# Altium PCB PCB1.PcbDoc
Units mm, origin at the board's own origin, x right, y up, seen from the top; angles counter-clockwise.
Board outline 160 x 100 mm, 4 copper layers (Top Layer, Top inner, Bottom inner, Bottom Layer), stack 1.538 mm thick; 114 components, 70 nets, 369 pads, 84 vias.
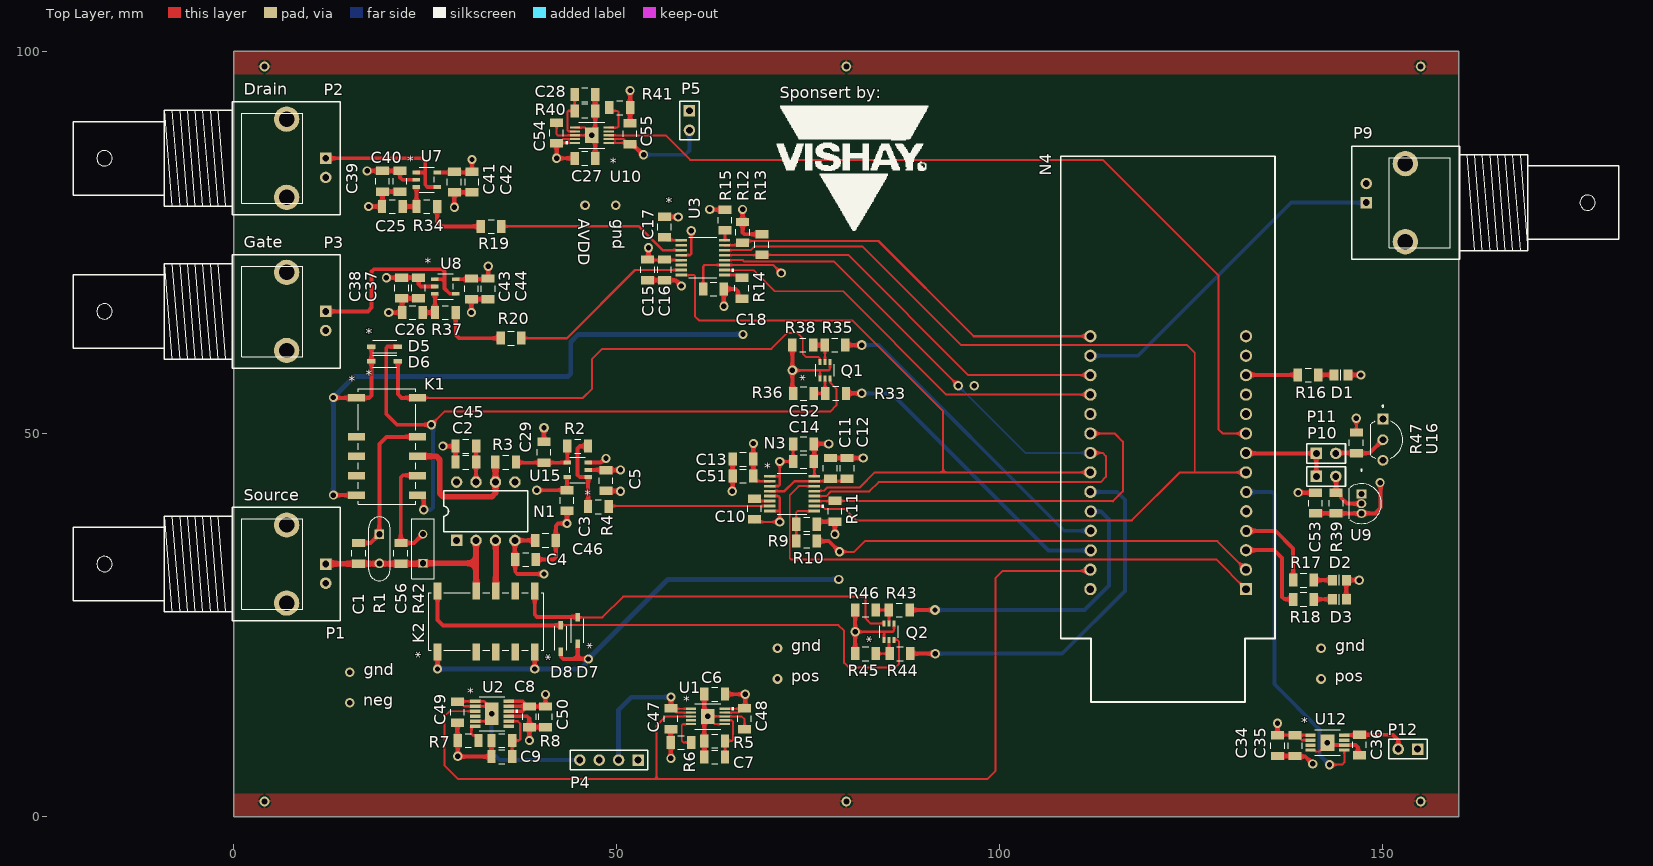
[diagram p0: Top Layer view]
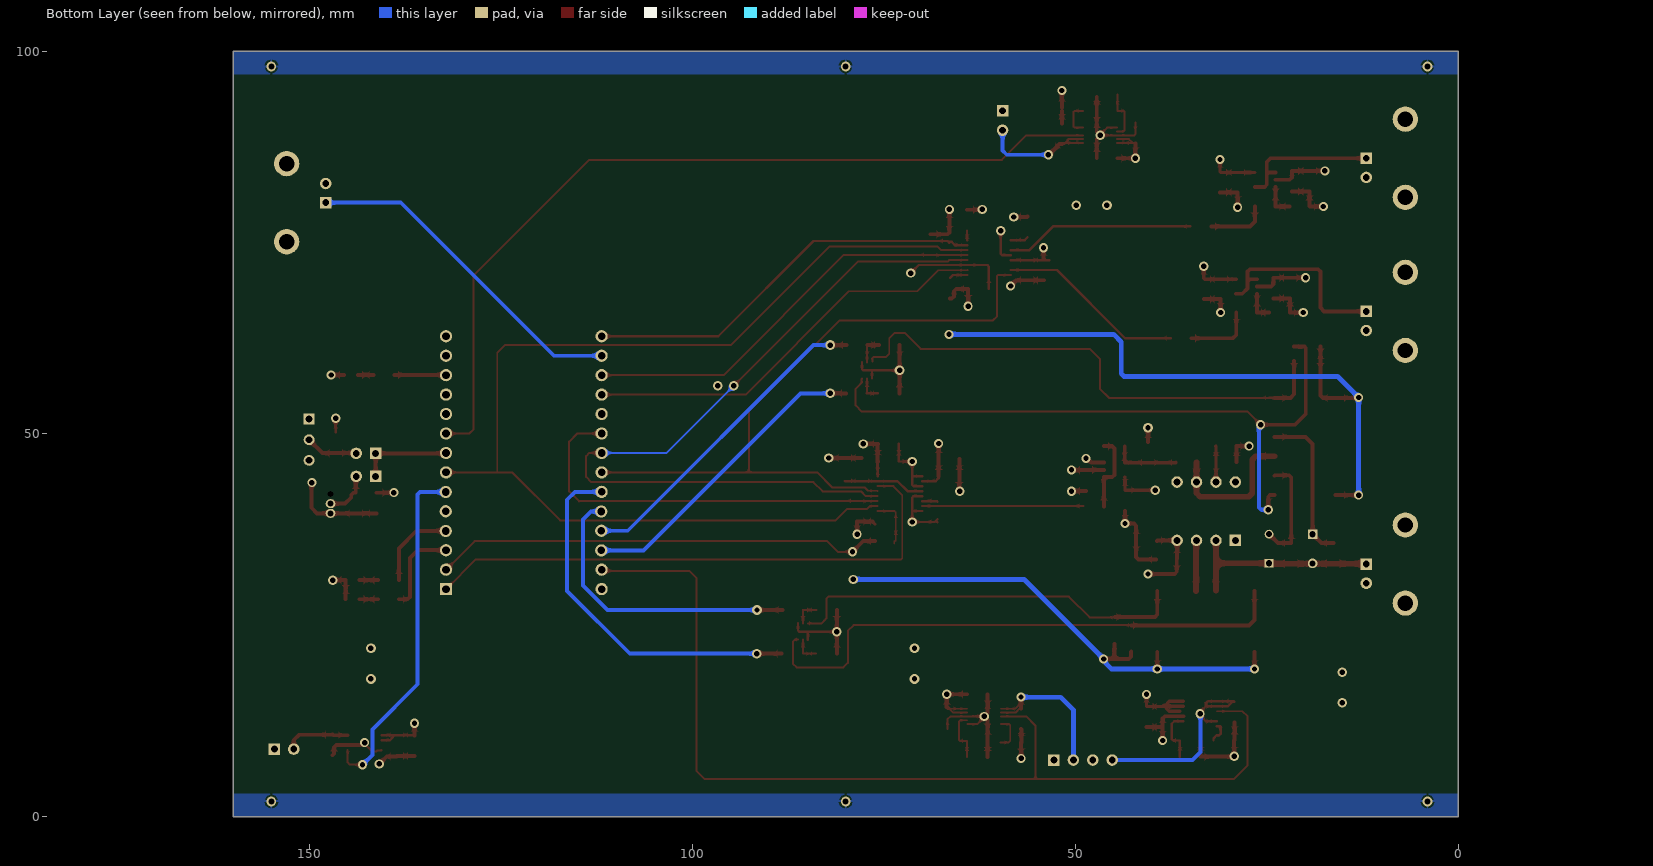
[diagram p1: Bottom Layer view, seen from below]
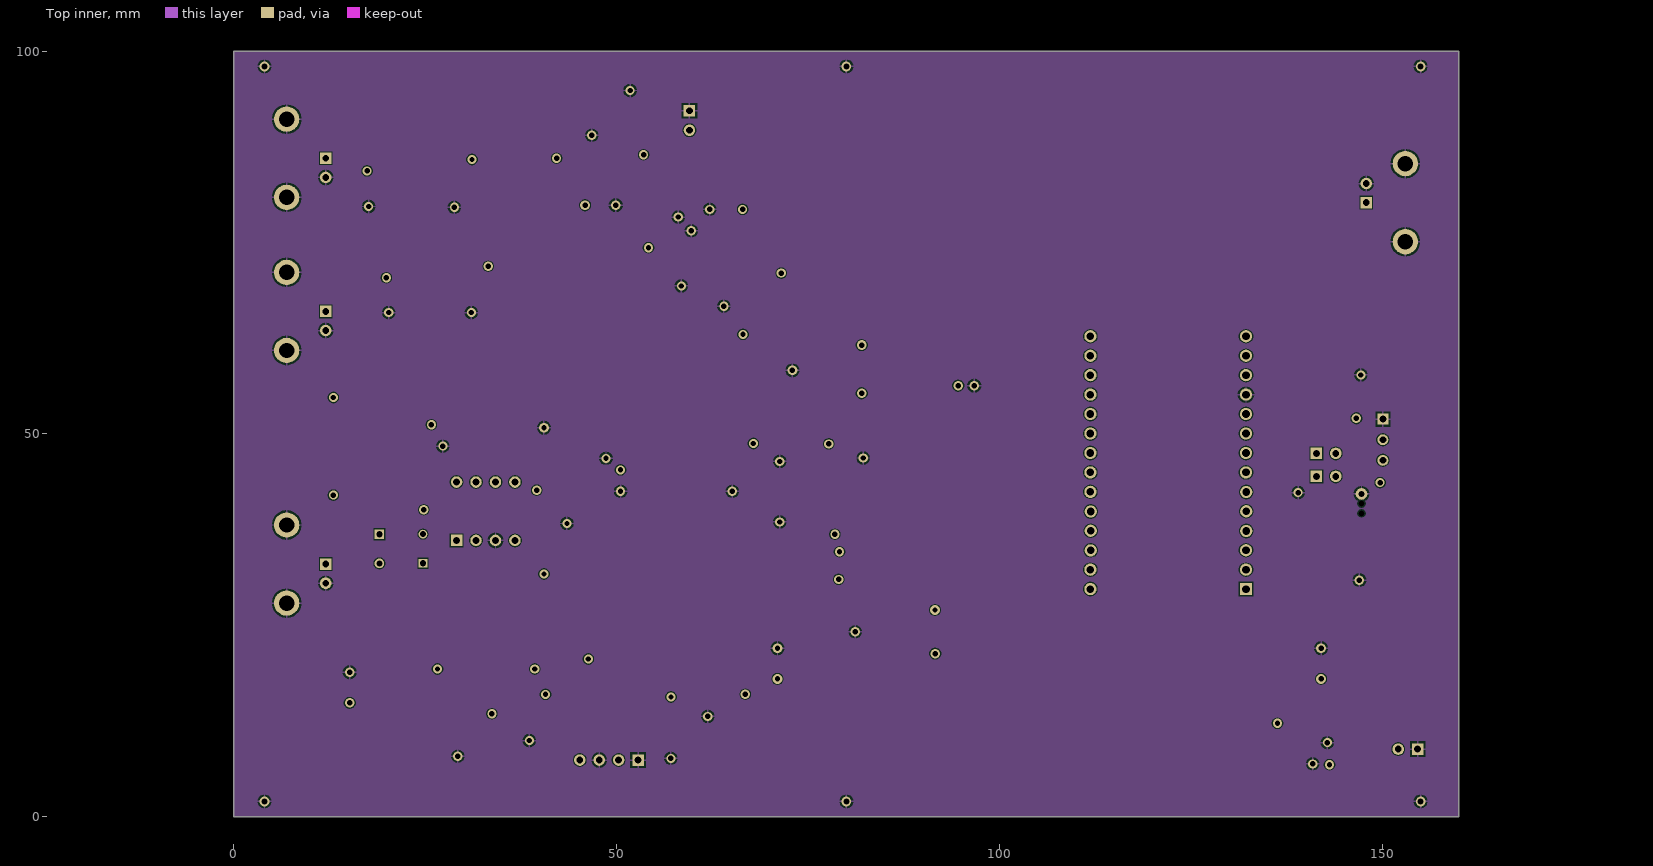
[diagram p2: Top inner]
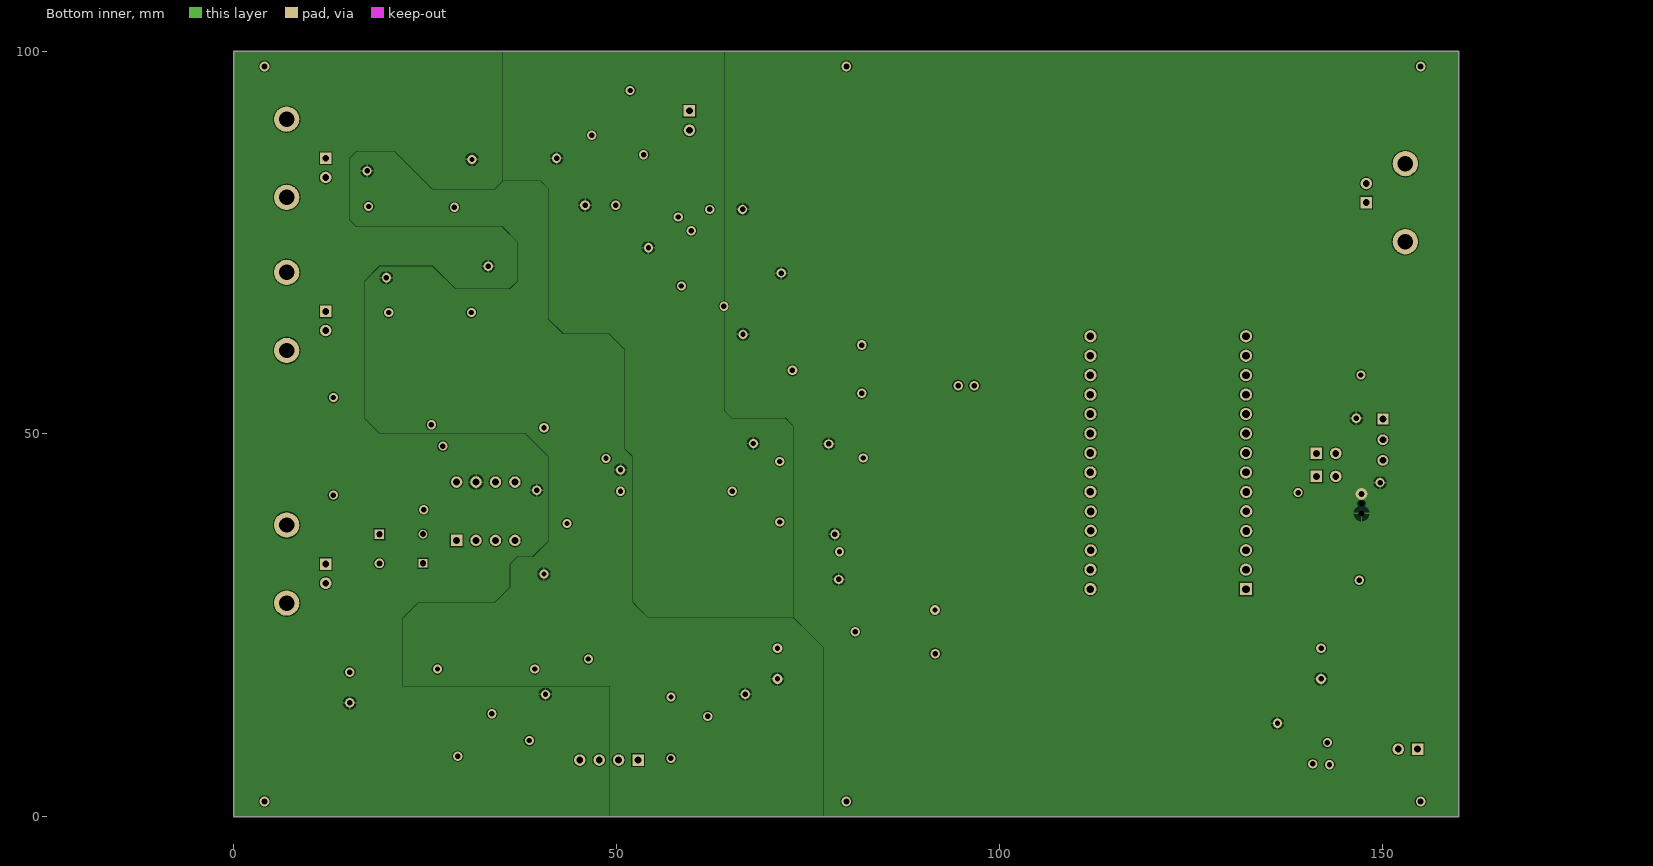
[diagram p3: Bottom inner]
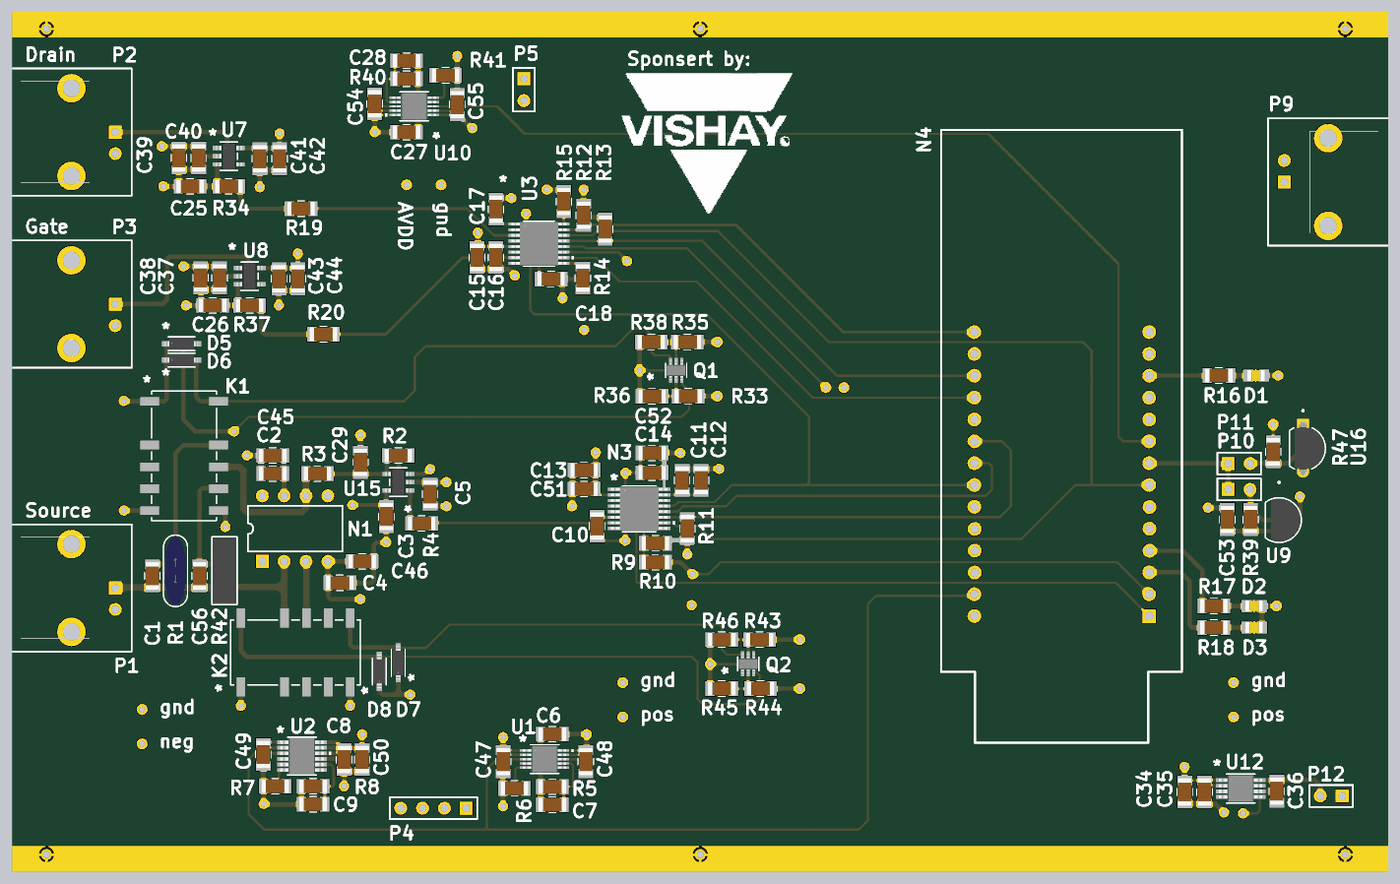
[diagram p4: 3D render of the assembled board from above, using the file's embedded part models]

## Layer stack, top to bottom
Top Solder: solder mask 0.0102, Solder Resist, Dk 3.5
Top Layer: signal copper 0.0356
Dielectric 4: prepreg 0.1524, PP-006, Dk 4.4
Top inner: signal copper 0.035
Dielectric 1: dielectric 1.0922, FR-4, Dk 4.8
Bottom inner: signal copper 0.035
Dielectric 5: prepreg 0.1524, PP-006, Dk 4.4
Bottom Layer: signal copper 0.0356
Bottom Solder: solder mask 0.0102, Solder Resist, Dk 3.5

## Board outline
0,0 160,0 160,100 0,100

## Design rules (kind name [scope] priority, off if disabled: settings)
Clearance [All] p1: gap=0.127 ignorepadtopadclearanceinfootprint=TRUE except(0.025: THPad-THPad)
MinimumSolderMaskSliver THT_21-0248A_Q3-1_MXM [HasFootprint('21-0248A_Q3-1_MXM')] p1: minsoldermaskwidth=0
MinimumSolderMaskSliver [All] p2: minsoldermaskwidth=0.127
PolygonConnect [All] p1: connectstyle=Relief reliefconductorwidth=0.254 reliefentries=4 polygonreliefangle="90 Angle" airgapwidth=0.254
RoutingVias [All] p1: holewidth=0.6 width=1.2 viastyle="Through Hole" minholewidth=0.3 minwidth=0.6 maxholewidth=1 maxwidth=2
SilkToSolderMaskClearance SilkToSolderMaskClearance_1 [HasFootprint('BNC_RA CON')] p1: minsilkscreentomaskgap=0 clearancetoexposedcopper=TRUE
SilkToSolderMaskClearance [IsPad] p2: minsilkscreentomaskgap=0.127 clearancetoexposedcopper=TRUE
SolderMaskExpansion [All] p1: expansion=0.102 istentingtop=FALSE
Width Source [InNet('M_source')] p1: maxlimit=2.54 minlimit=0.254 preferedwidth=0.762
Width Width_1 [All] p2: maxlimit=0.762 minlimit=0.254 preferedwidth=0.762
28 further rules are at their usual default settings.

## Classes and differential pairs
component class U_Cal: Q1 Q2 R33 R35 R36 R38 R43 R44 R45 R46
component class U_Digital_Psu: C34 C35 C36 U12
component class U_Analog_PSU_5: C27 C28 C54 R40 R41 U10
component class U_Temp_Sensors: C53 P10 P11 R39 R47 U9 U16
component class U_Source_TIA: C1 C2 C3 C4 C5 C29 C45 C46 C56 D5 D6 D7 D8 K1 K2 N1 R1 R2 R3 R4 R42 U15
component class U_OPV_psu: C6 C7 C8 C9 C47 C48 C49 C50 R5 R6 R7 R8 U1 U2
component class U_DAC_Buffer_Filter: C25 C26 C37 C38 C39 C40 C41 C42 C43 C44 R19 R20 R34 R37 U7 U8
component class U_CortexM3_dev: D1 D2 D3 N4 R16 R17 R18
component class U_ADC_8681: C10 C11 C12 C13 C14 C51 C52 N3 R9 R10 R11
component class U_AD_5689_DAC: C15 C16 C17 C18 R12 R13 R14 R15 U3
component class Top_Sheet: C55 P1 P2 P3 P4 P5 P9 P12

## Components (designator, comment, footprint, x,y, rotation, side; value= is the part's Value field where it differs from the comment)
C1 "22pF" C1206-KUE 16.3,34.4 r90 top
C2 "100nF" C1206-KUE 30.3,46.3 r0 top
C3 "100nF" C1206-KUE 43.503,41.3 r90 top
C4 "100nF" C1206-KUE 38.1,33.6 r180 top
C5 "100nF" C1206-KUE 48.603,43.9 r90 top
C6 "10uF" C1206-KUE 62.8,16 r0 top
C7 "4.7uF" C1206-KUE 62.8,7.8 r0 top
C8 "10uF" C1206-KUE 38.6,13.049 r90 top
C9 "4.7uF" C1206-KUE 35,7.849 r0 top
C10 "10uF" C1206-KUE 68,40.2 r90 top
C11 "100nF" C1206-KUE 77.9,45.5 r270 top
C12 "10uF" C1206-KUE 80.1,45.5 r270 top
C13 "100nF" C1206-KUE 66.5,46.7 r0 top
C14 "100nF" C1206-KUE 74.4,46.4 r0 top
C15 "10uF" C1206-KUE 54.05,71.425 r90 top
C16 "100nF" C1206-KUE 56.25,71.425 r90 top
C17 "100nF" C1206-KUE 56.25,77.025 r270 top
C18 "100nF" C1206-KUE 62.65,68.925 r180 top
C25 "1uF" C1206-KUE 20.7,79.7 r0 top
C26 "1uF" C1206-KUE 23.324,65.85 r0 top
C27 "10uF" C1206-KUE 45.849,86 r180 top
C28 "4.7uF" C1206-KUE 45.849,94.3 r180 top
C29 "" C1206-KUE 40.5,47.6 r270 top
C34 "100nF" C1206-KUE 136.323,9.279 r90 top
C35 "10uF" C1206-KUE 138.623,9.279 r90 top
C36 "4.7uF" C1206-KUE 147.023,9.379 r90 top
C37 "100nF" C1206-KUE 24.124,69.05 r90 top
C38 "1uF" C1206-KUE 21.924,69.05 r90 top
C39 "100nF" C1206-KUE 19.4,83 r90 top
C40 "1uF" C1206-KUE 21.7,83 r90 top
C41 "100nF" C1206-KUE 28.8,82.9 r90 top
C42 "1uF" C1206-KUE 31.1,82.9 r90 top
C43 "100nF" C1206-KUE 31.024,68.95 r90 top
C44 "1uF" C1206-KUE 33.224,68.95 r90 top
C45 "10uF" C1206-KUE 30.3,48.4 r0 top
C46 "10uF" C1206-KUE 40.7,36.1 r0 top
C47 "10uF" C1206-KUE 57.1,12.8 r90 top
C48 "100nF" C1206-KUE 66.7,12.8 r90 top
C49 "10uF" C1206-KUE 29.2,13.649 r90 top
C50 "100nF" C1206-KUE 40.7,13.049 r90 top
C51 "10uF" C1206-KUE 66.5,44.5 r0 top
C52 "10uF" C1206-KUE 74.4,48.7 r0 top
C53 "1uF" C1206-KUE 141.277,40.961 r270 top
C54 "100nF" C1206-KUE 42.149,89.3 r270 top
C55 "100nF" C1206-KUE 51.749,89.2 r270 top
C56 "22pF" C1206-KUE 21.8,34.4 r90 top
D1 "GREEN" 6-0805_N-KUE 144.6,57.7 r0 top
D2 "GREEN" 6-0805_N-KUE 144.4,30.9 r0 top
D3 "RED" 6-0805_N-KUE 144.4,28.4 r0 top
D5 "1N4148W-7" SOD123_DIO 19.7,61.4 r0 top
D6 "1N4148W-7" SOD123_DIO 19.7,59.5 r0 top
D7 "1N4148W-7" SOD123_DIO 44.9,24.3 r90 top
D8 "1N4148W-7" SOD123_DIO 42.7,23.3 r90 top
K1 "G6SK-2F-TR DC3" "RELAY_G6SK-2F DC3_OMR" 24,42 r0 top
K2 "G6SK-2F-TR DC3" "RELAY_G6SK-2F DC3_OMR" 39.3,29.5 r90 top
N1 "LMC6001AIN/NOPB" DIP8 32.9,39.9 r0 top
N3 "ADS8681IPW" PW16_TEX 72.9,42.2 r0 top
N4 "STM32F103" DIP28 136,15 r180 top
P1 "BNC" "BNC_RA CON" 12,33 r0 top
P2 "BNC" "BNC_RA CON" 12,86 r0 top
P3 "BNC" "BNC_RA CON" 12,66 r0 top
P4 "Header 4" HDR1X4 52.8,7.4 r180 top
P5 "Header 2" HDR1X2 59.5,92.2 r270 top
P9 "BNC" "BNC_RA CON" 147.9,80.2 r180 top
P10 "Header 2" HDR1X2 141.377,44.461 r0 top
P11 "Header 2" HDR1X2 141.377,47.461 r0 top
P12 "Header 2" HDR1X2 154.617,8.821 r180 top
Q1 "2N7002DW" SC-88SC70-6SOT-363_419B-02_ONS_OSI 77.2,58.3 r90 top
Q2 "2N7002DW" SC-88SC70-6SOT-363_419B-02_ONS_OSI 85.575,24.175 r90 top
R1 "CNS020-10MP" RES_CNS020_VIS 19,36.9 r270 top
R2 "10k" C1206-KUE 44.903,48.4 r180 top
R3 "33k" C1206-KUE 35.5,46.3 r180 top
R4 "10" C1206-KUE 47.603,40.5 r180 top
R5 "78.7k" C1206-KUE 62.8,9.9 r180 top
R6 "0" C1206-KUE 58.4,9.7 r180 top
R7 "0" C1206-KUE 30.6,9.949 r180 top
R8 "78.7k" C1206-KUE 35,9.949 r180 top
R9 "10k" C1206-KUE 74.8,38.2 r180 top
R10 "1k" C1206-KUE 74.8,36 r180 top
R11 "4.7k" C1206-KUE 78.5,39.9 r90 top
R12 "4.7k" C1206-KUE 66.45,76.325 r270 top
R13 "4.7k" C1206-KUE 68.95,74.725 r270 top
R14 "10k" C1206-KUE 66.35,69.025 r270 top
R15 "10k" C1206-KUE 64.15,77.925 r90 top
R16 "3.9k" C1206-KUE 140.3,57.7 r0 top
R17 "3.9k" C1206-KUE 139.7,30.9 r0 top
R18 "2.7k" C1206-KUE 139.7,28.4 r0 top
R19 "0" C1206-KUE 33.6,77.1 r180 top
R20 "0" C1206-KUE 36.2,62.5 r180 top
R33 "1k" C1206-KUE 78.6,55.3 r0 top
R34 "10k" C1206-KUE 25.2,79.7 r180 top
R35 "1k" C1206-KUE 78.5,61.6 r0 top
R36 "10k" C1206-KUE 74.4,55.275 r180 top
R37 "10k" C1206-KUE 27.624,65.85 r180 top
R38 "10k" C1206-KUE 74.3,61.6 r180 top
R39 "4.7k" C1206-KUE 143.977,40.961 r90 top
R40 "49.9k" C1206-KUE 45.849,92.2 r0 top
R41 "0" C1206-KUE 50.4,92.6 r0 top
R42 "Y0062100K000T9L" RES_S102K_7P62X2P67_VIS 24.7,33.1 r90 top
R43 "1k" C1206-KUE 86.9,27 r180 top
R44 "1k" C1206-KUE 87,21.3 r0 top
R45 "10k" C1206-KUE 82.5,21.3 r180 top
R46 "10k" C1206-KUE 82.5,27 r180 top
R47 "1k" C1206-KUE 146.604,48.834 r270 top
U1 "LT3042EMSE#TRPBF" 05-08-1664_ADI 61.9,13.1 r0 top
U2 "LT3094EMSE#TRPBF" MSE_05-08-1666_ADI 33.7,13.449 r0 top
U3 "AD5689RBRUZ" RU_16_ADI 61.25,73.025 r0 top
U7 "OPA197IDBVR" DBV5_TEX 25.2,83.2 r0 top
U8 "OPA197IDBVR" DBV5_TEX 27.624,69.25 r0 top
U9 "DS18B20+" 21-0248A_Q3-1_MXM 147.277,42.161 r270 top
U10 "LT3042EMSE#TRPBF" 05-08-1664_ADI 46.749,89 r180 top
U12 "TLV76733DGNR" VSSOP8_DGN_TEX 142.823,9.679 r0 top
U15 "OPA197IDBVR" DBV5_TEX 44.903,45.3 r180 top
U16 "DS28E07+T" 21-0250_Q3+4_MXM 150.073,51.927 r270 top

## Footprints (in the part's own frame and the unit in brackets; to place one, negate y for a bottom-side part, rotate by r counter-clockwise, add the part's x,y. Pads: shape width x height; smd on the part's side, far side on the other; paste and mask are expansions set on the pad)
05-08-1664_ADI [mil]
  rect 52.28x11 smd paste+0 mask+0: 1(-87.14,39.37) 2(-87.14,19.69) 3(-87.14,0) 4(-87.14,-19.68) 5(-87.14,-39.37) 6(87.14,-39.37) 7(87.14,-19.68) 8(87.14,0) 9(87.14,19.69) 10(87.14,39.37)
  rect 70x78 smd paste+0 mask+0: 11(0,0)
  silkscreen extent -66,-66 133,66, body extent -99,-61 99,61, height 43
6-0805_N-KUE [mm] "Chip Resistor, Body 2.0x1.2mm, IPC Medium Density"
  rect 1.2x1.4 smd: 1(-0.9,0) 2(0.9,0)
  silkscreen extent 0,-0.69 0,0.69, body extent -1,-0.63 1,0.63, height 0.8
21-0248A_Q3-1_MXM [mm]
  rect 1.168x1.27 / inner round 1.524 / far side rect 1.168x0 hole 0.8 paste-0.635 mask+0: 1(0,0)
  oval 1.168x1.27 / inner oval 1.524x0 / far side oval 1.168x1.27 hole 0.8 paste-0.635 mask+0: 2(1.27,0) 3(2.54,0)
  silkscreen extent -3.24,-1.59 3.87,2.6, body extent -1.21,-0.95 3.75,2.48, height 4.95
21-0250_Q3+4_MXM [mil]
  rect 56x56 hole 35 paste-28 mask+0: 1(0,0)
  round 56 hole 35 paste-28 mask+0: 2(105.91,0) 3(211.81,0)
  silkscreen extent -72,-62 200,102, body extent -12,-37 224,98, height 195
"BNC_RA CON" [mm] "Connector; BNC Elbow"
  rect 1.5x1.5 hole 0.9: 1(0,0)
  round 3.3 hole 2: 2(-5.1,-5.1) 2(-5.1,5.1)
  round 1.5 hole 0.9: 2(0,-2.5)
  silkscreen extent -33,-7.4 1.9,7.4
C1206-KUE [mm] "Chip Capacitor, Body 3.2x1.6mm, IPC High Density"
  rect 1.1x1.7 smd: 1(-1.35,0) 2(1.35,0)
  silkscreen extent -0.4,-0.9 0.4,0.9, body extent -1.6,-0.8 1.6,0.8, height 0.95
DBV5_TEX [mil]
  rect 38.5x20 smd paste+0 mask+0: 1(-53.75,37.4) 2(-53.75,0) 3(-53.75,-37.4) 4(53.75,-37.4) 5(53.75,37.4)
  silkscreen extent -40,-65 39,65, body extent -59,-60 59,60, height 57
DIP8 [mm] "DIP; 8 Leads; Row Spacing 7.62 mm; Pitch 2.54 mm"
  rect 1.5x1.5 hole 0.9: 1(-3.81,-3.81)
  round 1.5 hole 0.9: 2(-1.27,-3.81) 3(1.27,-3.81) 4(3.81,-3.81) 5(3.81,3.81) 6(1.27,3.81) 7(-1.27,3.81) 8(-3.81,3.81)
  silkscreen extent -5.5,-2.65 5.5,2.65
DIP28 [mm]
  round 1.6 hole 1: 1(24.13,-47.752) 2(24.13,-45.212) 3(24.13,-42.672) 4(24.13,-40.132) 5(24.13,-37.592) 6(24.13,-35.052) 7(24.13,-32.512) 8(24.13,-29.972) 9(24.13,-27.432) 10(24.092,-24.868) 11(24.092,-22.349) 12(24.092,-19.788) 13(24.13,-17.272) 14(24.13,-14.732) 15(3.81,-47.752) 16(3.81,-45.212) 17(3.81,-42.672) 18(3.81,-40.132) 19(3.81,-37.592) 20(3.81,-35.052) 21(3.81,-32.512) 22(3.81,-29.972) 23(3.772,-27.408) 24(3.772,-24.889) 25(3.772,-22.328) 26(3.81,-19.812) 27(3.81,-17.272)
  rect 1.6x1.6 hole 1: 28(3.81,-14.732)
  silkscreen extent 0,-71.26 28,0
HDR1X2 [mm] "Connector; Header; 2 Position"
  rect 1.5x1.5 hole 0.9: 1(0,0)
  round 1.5 hole 0.9: 2(2.54,0)
  silkscreen extent -1.27,-1.27 3.81,1.27
HDR1X4 [mm] "Connector; Header; 4 Position"
  rect 1.5x1.5 hole 0.9: 1(0,0)
  round 1.5 hole 0.9: 2(2.54,0) 3(5.08,0) 4(7.62,0)
  silkscreen extent -1.27,-1.27 8.89,1.27
MSE_05-08-1666_ADI [mil]
  rect 54.56x16.97 smd paste+0 mask+0: 1(-86,63.98) 2(-86,38.39) 3(-86,12.8) 4(-86,-12.8) 5(-86,-38.39) 6(-86,-63.98) 7(86,-63.98) 8(86,-38.39) 9(86,-12.8) 10(86,12.8) 11(86,38.39) 12(86,63.98)
  rect 69x116 smd paste-57.5 mask+0: 13(0,0)
  silkscreen extent -66,-87 133,86, body extent -99,-81 99,81, height 43
PW16_TEX [mil]
  rect 58x14 smd paste+0 mask+0: 1(-115,89.57) 2(-115,63.98) 3(-115,38.39) 4(-115,12.8) 5(-115,-12.79) 6(-115,-38.39) 7(-115,-63.98) 8(-115,-89.57) 9(115,-89.57) 10(115,-63.98) 11(115,-38.39) 12(115,-12.8) 13(115,12.8) 14(115,38.39) 15(115,63.98) 16(115,89.57)
  silkscreen extent -76,-106 164,105, body extent -130,-101 130,101, height 47
"RELAY_G6SK-2F DC3_OMR" [mil]
  rect 87x39 smd paste+0 mask+0: 1(-314.96,500) 3(-314.96,300) 4(-314.96,200) 5(-314.96,100) 6(-314.96,0) 7(0,0) 8(0,100) 9(0,200) 10(0,300) 12(0,500)
  silkscreen extent -306,-46 -9,546
RES_CNS020_VIS [mm]
  rect 1.27x1.27 hole 0.8 paste-0.635 mask+0: 1(0,0)
  round 1.27 hole 0.8 paste-0.635 mask+0: 2(3.81,0)
  silkscreen extent -2.26,-1.4 6.07,1.4, body extent -2.13,-1.27 5.94,1.27, height 6.6
RES_S102K_7P62X2P67_VIS [mil]
  rect 45x45 hole 31.5 paste-22.5 mask+0: 1(0,0)
  round 45 hole 31.5 paste-22.5 mask+0: 2(150,0)
  silkscreen extent -80,-57 230,58, body extent -75,-53 225,53, height 336
RU_16_ADI [mm]
  rect 1.461x0.351 smd paste+0 mask+0: 1(-2.825,2.275) 2(-2.825,1.625) 3(-2.825,0.975) 4(-2.825,0.325) 5(-2.825,-0.325) 6(-2.825,-0.975) 7(-2.825,-1.625) 8(-2.825,-2.275) 9(2.825,-2.275) 10(2.825,-1.625) 11(2.825,-0.975) 12(2.825,-0.325) 13(2.825,0.325) 14(2.825,0.975) 15(2.825,1.625) 16(2.825,2.275)
  silkscreen extent -1.81,-2.63 4.06,2.63, body extent -3.2,-2.5 3.2,2.5, height 1.2
SC-88SC70-6SOT-363_419B-02_ONS_OSI [mm]
  rect 0.782x0.355 smd paste+0 mask+0: 1(-1.064,0.65) 2(-1.064,0) 3(-1.064,-0.65) 4(1.064,-0.65) 5(1.064,0) 6(1.064,0.65)
  silkscreen extent -0.8,-1.23 0.8,1.23, body extent -1.1,-1.1 1.1,1.1, height 1.09
SOD123_DIO [mm]
  rect 1.111x0.601 smd paste+0 mask+0: 1(-1.725,0) 2(1.725,0)
  silkscreen extent -1.55,-0.8 1.55,0.8, body extent -1.92,-0.67 1.92,0.67, height 0.81
VSSOP8_DGN_TEX [mil]
  rect 52.5x17 smd paste+0 mask+0: 1(-87.25,38.38) 2(-87.25,12.79) 3(-87.25,-12.8) 4(-87.25,-38.39) 5(87.25,-38.39) 6(87.25,-12.8) 7(87.25,12.79) 8(87.25,38.38)
  rect 73x85 smd paste+0 mask+0: EPAD(0,0)
  silkscreen extent -66,-66 66,66, body extent -99,-61 99,61, height 43

## Part data
C1 C2 C3 C4 C5 C6 C7 C8 C9 C10 C11 C12 C13 C14 C15 C16 C17 C18 C25 C26 C27 C28 C29 C34 C35 C36 C37 C38 C39 C40 C41 C42 C43 C44 C45 C46 C47 C48 C49 C50 C51 C52 C53 C54 C55 C56: library part Capacitor, "Capacitor", Manufacturer=Kemet, Bezeichnung="Kerko +-10% 63V", LatestRevisionDate=17-Jul-2002, LatestRevisionNote="Re-released for DXP Platform.", PackageDescription="Radial Cap, Thru-Hole; 2 Leads; 0.3 in Pin Spacing", PackageReference=RAD-0.3, Published=8-Jun-2000, Publisher="Altium Limited"
D1 D2 D3: library part LED0, "Typical INFRARED GaAs LED", LatestRevisionDate=08-Jul-2005, LatestRevisionNote="Mech Layer 1 removed.", PackageDescription="LED; 2 Leads", PackageReference=LED-0, Published=8-Jun-2000, Publisher="Altium Limited"
D5 D6 D7 D8: "Description", Manufacturer_Name="Diodes Inc", Copyright="Copyright (C) 2026 Ultra Librarian. All rights reserved.", Manufacturer_Part_Number=1N4148W-7
K1 K2: "Description", Manufacturer_Name=Omron, Copyright="Copyright (C) 2026 Ultra Librarian. All rights reserved.", Manufacturer_Part_Number="G6SK-2F-TR DC3", RefDes=RefDes, Type=Type
N1: library part LMC6001AINNOPB, "Ultra-Low Input Current Amplifier 8-PDIP -40 to 85", Manufacturer=NationalSemiconductor, Manufacturer_Name="Texas Instruments", PartNumber=LMC6001AIN, Characteristics=LMC6001AINUltra-LowInputBiasCurrentOpAmp, ComponentLink1DescBC=LMC6001Datasheet, ComponentLink1URL=http//wwwnationalcom/ds/LM/LMC6001pdf, ComponentLink2DescA4=LMC6001WebPage, ComponentLink2URL=http//wwwnationalcom/pf/LM/LMC6001html, ComponentLink3DescAC=N08EPackageWebPage, ComponentLink3URL=http//wwwnationalcom/packaging/folders/n08ehtml, CompType=OpAmpIC, Copyright="Copyright (C) 2025 Ultra Librarian. All rights reserved.", LatestRevisionDate=2009-03-16, LatestRevisionNote=MassUpdate, Manufacturer_Part_Number=LMC6001AIN/NOPB, PackageDescription=8LeadPlasticDIP, PackageReference=N08E_L, Published=2009-03-16, Publisher=NationalSemiconductor, RoHS=O, SymbolVersion=2008-07-09, TaMax_C=850, TaMin_C=-400, Version=B1608
N3: "16-bit, 1MSPS 1-ch SAR ADC with programmable (Â±12V, Â±10V, Â±6V, Â±5V, Â±2.5V) input ranges on 5V supply 16-TSSOP -40 to 125", Manufacturer_Name="Texas Instruments", Copyright="Copyright (C) 2025 Ultra Librarian. All rights reserved.", Manufacturer_Part_Number=ADS8681IPW, RefDes=RefDes, Type=Type
P1 P2 P3 P9: "BNC Elbow Connector", LatestRevisionDate=17-Jul-2002, LatestRevisionNote="Re-released for DXP Platform.", Publisher="Altium Limited"
P4: "Header, 4-Pin", LatestRevisionDate=17-Jul-2002, LatestRevisionNote="Re-released for DXP Platform.", Publisher="Altium Limited"
P5 P10 P11 P12: "Header, 2-Pin", LatestRevisionDate=17-Jul-2002, LatestRevisionNote="Re-released for DXP Platform.", Publisher="Altium Limited"
Q1 Q2: "Description", Manufacturer_Name=onsemi, Copyright="Copyright (C) 2026 Ultra Librarian. All rights reserved.", Manufacturer_Part_Number=2N7002DW, RefDes=RefDes, Type=Type
R1: library part CNS020-10KP, "CNS 020 10K 0,02% e2", Manufacturer_Name=Vishay, Copyright="Copyright (C) 2026 Ultra Librarian. All rights reserved.", Datasheet=https://www.vishay.com/doc?60051, Manufacturer_Part_Number=CNS020-10KP
R2 R3 R4 R5 R6 R7 R8 R9 R10 R11 R12 R13 R14 R15 R16 R17 R18 R19 R20 R33 R34 R35 R36 R37 R38 R39 R40 R41 R43 R44 R45 R46 R47: library part ResistorSMD, "Resistor SMD", Manufacturer=AVX, Bezeichnung="SMD Wid. 1/8W 2%", LatestRevisionDate=17-Jul-2002, LatestRevisionNote="Re-released for DXP Platform.", PackageDescription="Axial Device, Thru-Hole; 2 Leads; 0.4 in Pin Spacing", PackageReference=AXIAL-0.4, Published=8-Jun-2000, Publisher="Altium Limited"
R42: "No Description Available", Manufacturer_Name=Vishay, Copyright="Copyright (C) 2026 Ultra Librarian. All rights reserved.", Manufacturer_Part_Number=Y0062100K000T9L
U1 U10: library part LT3042EMSETRPBF, "20V, 200mA, Ultralow Noise, Ultrahigh PSRR RF Linear Regulator", Manufacturer_Name="Analog Devices Inc", Copyright="Copyright (C) 2025 Ultra Librarian. All rights reserved.", Manufacturer_Part_Number=LT3042EMSE#TRPBF, RefDes=RefDes, Type="Power Management"
U2: library part LT3094EMSETRPBF, "âˆ’20V, 500mA, Ultralow Noise, Ultrahigh PSRR Negative Linear Regulator", Manufacturer_Name="Analog Devices Inc", Copyright="Copyright (C) 2025 Ultra Librarian. All rights reserved.", Manufacturer_Part_Number=LT3094EMSE#TRPBF, RefDes=RefDes, Type=Type
U3: "Dual, 16-Bit nanoDAC+ with 2 ppm/Â°C Reference, SPI Interface", Manufacturer_Name="Analog Devices Inc", Copyright="Copyright (C) 2026 Ultra Librarian. All rights reserved.", Manufacturer_Part_Number=AD5689RBRUZ, RefDes=RefDes, Type=Type
U7 U8 U15: "Single, 36-V, precision, rail-to-rail input output, low offset voltage op amp 5-SOT-23 -40 to 125", Manufacturer_Name="Texas Instruments", Copyright="Copyright (C) 2025 Ultra Librarian. All rights reserved.", Manufacturer_Part_Number=OPA197IDBVR, RefDes=RefDes, Type=Type
U9: "Programmable Resolution 1-Wire Digital Thermometer", Manufacturer_Name="Analog Devices Inc", Copyright="Copyright (C) 2025 Ultra Librarian. All rights reserved.", Manufacturer_Part_Number=DS18B20+, RefDes=RefDes, Type=Type
U12: "Adjustable- and fixed-output, 1-A, 16-V, positive-voltage low-dropout (LDO) linear regulator 8-HVSSOP -40 to 125", Manufacturer_Name="Texas Instruments", Copyright="Copyright (C) 2025 Ultra Librarian. All rights reserved.", Manufacturer_Part_Number=TLV76733DGNR, RefDes=RefDes, Type="Power Management"
U16: "1024-Bit, 1-Wire EEPROM", Manufacturer_Name="Analog Devices Inc", Copyright="Copyright (C) 2026 Ultra Librarian. All rights reserved.", Manufacturer_Part_Number=DS28E07+T, RefDes=RefDes, Type=Type

## Via types
v1: diameter 1.2, hole 0.7, Top Layer to Bottom Layer, 60 vias
v2: diameter 1.27, hole 0.7, Top Layer to Bottom Layer, 9 vias
v3: diameter 1.27, hole 0.711, Top Layer to Bottom Layer, 9 vias
v4: diameter 1.27, hole 0.8, Top Layer to Bottom Layer, 6 vias

## Nets (pads, with @x,y where several pads share a name; then routed paths per layer and width w, separated by ;. In a path a pad name is that pad's centre, name@x,y a point inside that pad or via, vN(x,y) a via of type N, cw(c..) or ccw(c..) an arc to the next point about the centre after c; other vN are vias at no path point)
AVDD: C13.2 C15.2 C16.2 C27.2 C51.2 C54.2 N3.2 U3.5 U10.9 U10.10 | length 22.4
  Top Layer w0.254: C54.2@42.199,88 C54.2@42.499,88 ; U10.10 C54.2@42.499,88 ; U10.9 42.999,88.5 C54.2@42.499,88
  Top Layer w0.305: C15.2@53.425,72.7 C15.2@54.125,72.7 ; C15.2 C15.2@54.125,72.7 ; U3.5 C15.2@54.125,72.7 ; C51.2 67.85,44.223 68.248,43.825 N3.2
  Top Layer w0.508: C54.2 v1(42.149,86) C27.2 ; C15.2 54.15,72.875 v1(54.15,74.325) ; C51.2 C13.2 v1(67.85,48.75)
  other v3: 45.873,79.873
damper_out: R2.1 R4.2 U15.1 | length 10.3
  Top Layer w0.508: R4.2 46.269,40.515 U15.1 45.201,44.35 44.903,44.648 44.903,48.102 45.201,48.4 R2.1
DVDD: C14.2 C18.2 C34.2 C35.2 C52.2 C53.2 D5.1 D6.1 D7.1 D8.1 K1.1 K1.6 K2.1 K2.6 N3.16 R9.1 R11.1 R12.1 R13.1 R39.1 R47.1 U3.11 U9.3 U12.1 U12.2 | length 206.6
  Top Layer w0.305: C18.2 61.3,71.871 61.479,72.05 U3.11 70.45,72.05 v1(71.5,71) ; C52.2 C52.2@75.821,48.629 ; N3.16 C14.2@75.821,46.329 ; R9.1 R9.1@76.5,38.55 ; C34.2 136.348,10.653 U12.1 ; C35.2 138.923,10.629 139.32,10.231 139.32,10.182 139.499,10.003 U12.2 ; R47.1 v2(146.604,52.034)
  Top Layer w0.508: v1(13,42) K1.6 ; v1(13,54.75) 13.05,54.7 K1.1 17.677,54.7 17.975,54.998 D6.1 D5.1 ; v1(26.6,19.3) K2.1 ; v1(39.3,19.3) K2.6 ; D8.1 42.746,21.529 42.746,20.898 43.044,20.6 44.9,20.6 ; D7.1 44.9,20.6 ; v1(46.3,20.6) 44.9,20.6 ; v1(66.45,79.325) R12.1 66.45,76.325 66.7,76.075 R13.1 ; C14.2 C14.2@75.821,46.329 ; C52.2 v1(77.7,48.7) ; C14.2@75.821,46.4 C52.2@75.821,48.629 ; R9.1@76.5,38.55 R11.1 v1(78.5,36.9) ; v1(136.3,12.2) 136.3,10.651 C34.2 ; C53.2 R39.1 147.267,39.611 U9.3 149.037,39.621 149.777,40.361 v1@149.777,43.761
  Bottom Layer w0.635: v1(13,42) v1(13,54.75) 15.75,57.5 43.628,57.5 44,57.872 44,62 45,63 v1(66.5,63) ; v1(26.6,19.3) v1(39.3,19.3) 45.3,19.3 45.983,19.983 45.983,20.111 46.3,20.428 v1(46.3,20.6) 56.7,31 v1(79,31)
  other v1: 149.704,43.634
  other v3: 142,18
GND: C2.1 C3.1 C4.1 C5.1 C6.1 C7.1 C8.1 C9.1 C10.1 C11.1 C12.1 C13.1 C14.1 C15.1 C16.1 C17.1 C18.1 C25.1 C26.1 C27.1 C28.1 C29.1 C34.1 C35.1 C36.1 C37.1 C38.1 C39.1 C40.1 C41.1 C42.1 C43.1 C44.1 C45.1 C46.2 C47.1 C48.1 C49.1 C50.1 C51.1 C52.1 C53.1 C54.1 C55.1 D1.2 D2.2 D3.2 K2.9 N1.3 N3.1 N3.3 N3.5 N3.8 N4.18 P1.2 P2.2 P3.2 P4.1 P4.3 P5.1 P9.2 P12.1 Q1.1 Q1.4 Q2.1 Q2.4 R5.2 R6.2 R7.2 R8.2 R14.2 R15.2 R36.2 R38.2 R40.2 R41.2 R45.2 R46.2 U1.6 U1.8 U1.11 U2.9 U3.4 U9.1 U10.6 U10.8 U10.11 U12.4 U12.6 U12.EPAD U15.3 U16.1 | length 199.3
  Top Layer w0.254: C54.1 42.149,89.149 42.298,89 U10.8 v1(46.749,89) ; U10.6 45.851,90 U10.11@46.749,89.102 ; U1.11@61.9,12.998 62.662,12.236 62.674,12.236 62.811,12.1 U1.6 ; v1(61.9,13.1) U1.8 66.3,13.1 66.7,12.7 C48.1
  Top Layer w0.305: U3.4 59.571,73.35 59.75,73.529 v1(59.75,76.525) ; C10.1@68,38.45 C10.1@68.05,38.5 ; C10.1 68.35,38.5 v1(71.3,38.5) 71.3,40.104 ; N3.8 71.121,39.925 71.3,40.104 ; N3.5 71.121,41.875 71.3,41.696 71.3,40.104 ; N3.3 71.121,43.175 71.3,43.354 v1(71.3,46.4) C14.1 C52.1 ; N3.1 71.121,44.475 ; v2(72.95,58.3) 77.671,58.3 77.85,58.479 Q1.4 ; Q1.1 76.55,58.25 ; v1(81.15,24.15) 86.046,24.15 86.225,24.329 Q2.4@86.225,25.264 ; Q2.1@84.925,23.136 84.925,23.996 ; U12.4 140.67,8.64 141.173,8.64 141.3,8.513 141.81,8.513 U12.EPAD@142.823,9.526
  Top Layer w0.508: v1(17.6,79.7) C25.1 19.4,79.75 C39.1 C40.1 ; v1(20.224,65.85) C26.1 21.974,67.65 C38.1 C37.1 ; v1(27.3,48.4) C45.1 C2.1 ; v1(28.8,79.6) C41.1 C42.1 ; C49.1 29.2,9.999 R7.2 v1(29.25,7.899) 29.3,7.849 C9.1 R8.2 ; v1(31.024,65.85) C43.1 C44.1 ; N1.3 N1.3@34.22,36.04 ; U2.9 38.302,13.124 38.6,12.826 C8.1 ; v1(38.6,9.949) C8.1 ; C4.1 41.752,33.6 42.05,33.898 C46.2 42.05,38.002 42.348,38.3 v1(43.503,38.3) C3.1 ; C29.1 v2(40.5,50.8) ; C50.1 C8.1 ; U15.3 47.925,46.25 48.475,46.8 v1(48.603,46.8) ; v1(46.749,89) 47.199,88.55 C27.1 ; U10.11@46.8,89.051 47.199,89.45 R40.2 C28.1@47.199,94 ; C5.1 48.607,42.547 50.457,42.547 v1(50.503,42.5) ; C55.1 R41.2@51.749,92.15 ; R41.2 v1(51.751,94.849) ; C15.1 C16.1 57.7,70.075 v1(58.45,69.325) ; C17.1 56.275,78.35 58.025,78.35 v1(58.05,78.325) ; v1(57.077,7.623) 57.075,7.625 57.075,9.675 R6.2 57.05,11.4 C47.1 ; C7.1 R5.2 U1.11@61.45,12.65 ; U1.11@61.45,13.55 C6.1 ; v1(62.15,79.325) 62.2,79.275 R15.2 ; v1(64,66.675) C18.1 65.543,68.925 65.841,68.627 65.841,67.971 66.137,67.675 R14.2 ; v1(65.1,42.5) 65.15,42.55 C51.1 C13.1 ; R36.2@72.95,55.3 v2(72.95,58.3) R38.2@72.95,61.475 ; C11.1 C12.1 v1(82.2,46.85) ; R45.2 v1(81.15,24.15) R46.2 ; C34.1 C35.1 ; C35.1@138.623,7.906 138.666,7.863 139.937,7.863 v1(140.9,6.9) ; v1(139.004,42.334) 139.027,42.311 C53.1 ; U12.EPAD@142.853,9.353 U12.6 146.525,9.353 146.823,9.056 146.823,8.229 C36.1 ; D3.2 D2.2 v2(147,30.9) ; D1.2 v1(147.2,57.7)
  Top Layer w0.762: K2.9 N1.3@34.22,36.04
  other v1: 142.823,9.679
  other v3: 15.127,18.873 71,22 142,22 96.7,56.3 49.873,79.873
  other v4: 4,2 80,2 155,2 4,98 80,98 155,98
M_source: C1.1 C56.1 K2.10 N1.2 P1.1 R1.2 R42.1 | length 26.3
  Top Layer w0.508: R42.1@24.65,33.05 R42.1 ; K2.10@31.58,29.5 K2.10@31.63,29.55
  Top Layer w0.762: P1.1 12.05,33.05 C1.1 C56.1 R42.1@24.65,33.05 ; R42.1 31.63,33.1 ; K2.10@31.63,29.55 31.63,33.1 ; N1.2 31.63,33.1
neg_out: C2.2 C3.2 C8.2 C41.2 C42.2 C43.2 C44.2 C45.2 C50.2 N1.7 U2.10 U2.11 U2.12 U7.5 U8.5 U15.5 | length 34.6
  Top Layer w0.432: U7.5 31,84.15 C42.2 v1(31.1,85.848) ; U8.5 33.124,70.2 C44.2 v1(33.224,71.898) ; N1.7 31.63,48.38 C45.2 C45.2@31.675,48.425 ; U2.11 C8.2@38.275,14.424 ; U2.12 37.713,15.074 37.966,14.821 37.966,14.733 38.125,14.574 38.425,14.574 38.575,14.424 C8.2 ; U2.10@36.361,13.774 37.713,13.774 37.966,14.027 37.966,14.065 38.3,14.399 C8.2@38.45,14.399 ; C8.2@38.425,14.424 C8.2@38.45,14.399 ; v1(39.55,42.65) C3.2 43.503,44.315 U15.5 ; v1(40.7,15.983) C50.2 C8.2 ; C8.2@38.45,14.399 C8.2
  Top Layer w0.508: C8.2@38.125,14.574 38.275,14.424 38.425,14.424 C8.2@38.575,14.424
  other v3: 15.127,14.873
NetC1_2: C1.2 K1.10 R1.1 | length 20.4
  Top Layer w0.508: C1.2 17.85,35.75 R1.1 19,48.7 19.92,49.62 K1.10
NetC7_2: C7.2 R5.1 U1.7 | length 6.7
  Top Layer w0.254: U1.7 65,12.6 65.2,12.4 65.2,10.049 65.051,9.9 R5.1 C7.2
NetC9_2: C9.2 R8.1 U2.8 | length 6.9
  Top Layer w0.305: U2.8 37.075,12.474 37.4,12.149 37.4,10.127 37.221,9.949 R8.1 C9.2
NetC17_2: C17.2 U3.1 | length 2.3
  Top Layer w0.305: C17.2 56.625,75.3 U3.1
NetC25_2: C25.2 R34.2 U7.3 | length 4.4
  Top Layer w0.508: C25.2 R34.2 23.85,82.25 U7.3
NetC26_2: C26.2 R37.2 U8.3 | length 4.1
  Top Layer w0.508: C26.2 R37.2 26.274,68.3 U8.3
NetC28_2: C28.2 R40.1 U10.7 | length 6.6
  Top Layer w0.254: C28.2 R40.1 43.698,92.2 43.549,92.051 43.549,89.649 43.698,89.5 U10.7
NetC29_2: C29.2 R2.2 R3.1 U15.4 | length 8.9
  Top Layer w0.432: R3.1 36.9,46.25 U15.4 43.553,46.265 R2.2
NetC36_2: C36.2 P12.2 U12.8 | length 8.6
  Top Layer w0.432: U12.8 146.948,10.653 C36.2
  Top Layer w0.508: C36.2 147.051,10.7 151.4,10.7 152.077,10.023 P12.2
NetC47_2: C47.2 P4.2 U1.1 U1.2 | length 20.7
  Top Layer w0.254: v1(57.089,15.646) v1@57.1,15.634 ; C47.2@57.261,14.15 57.811,13.6 U1.2 ; C47.2@57.4,14.55 57.85,14.1 U1.1
  Top Layer w0.508: C47.2 v1@57.1,15.634
  Bottom Layer w0.635: P4.2 50.26,13.96 51.9,15.6 57.043,15.6 v1(57.089,15.646)
NetC49_2: C49.2 P4.4 U2.1 U2.2 U2.5 U2.13 | length 28.8
  Top Layer w0.305: U2.5 32.976,12.474 U2.13@33.7,13.198 ; U2.13@33.7,13.7 U2.13@32.976,14.424 ; U2.13@32.976,14.424 32.976,14.773 32.675,15.074 U2.1 29.275,15.074 C49.2 29.5,14.999 30.075,14.424 U2.2 U2.13@32.976,14.424
  Bottom Layer w0.508: v1(33.7,13.449) 33.65,13.399 33.65,8.45 34.7,7.4 P4.4
NetC55_2: C55.2 P5.2 U10.1 U10.2 | length 16.6
  Top Layer w0.254: U10.1 C55.2@51.299,88 ; U10.2 50.878,88.5 51.026,88.351 51.026,88.273 C55.2@51.299,88 ; C55.2@51.449,87.85 C55.2@51.299,88 ; C55.2@51.599,88 C55.2@51.299,88
  Top Layer w0.508: C55.2 52.049,87.85 53.439,86.46 v1(53.511,86.46)
  Bottom Layer w0.508: v1(53.511,86.46) 58.96,86.46 59.5,87 P5.2
NetC56_2: C56.2 K1.8 R42.2 | length 14.3
  Top Layer w0.508: K1.8 23.94,44.6 22.098,44.6 21.8,44.302 C56.2 23.54,35.75 R42.2
NetD1_1: D1.1 R16.2 | length 2.1
  Top Layer w0.508: R16.2 D1.1
NetD2_1: D2.1 R17.2 | length 2.5
  Top Layer w0.508: R17.2 D2.1
NetD3_1: D3.1 R18.2 | length 2.5
  Top Layer w0.508: R18.2 D3.1
NetD5_2: D5.2 K1.7 Q1.3 | length 89.3
  Top Layer w0.254: v1(25.8,51.2) 27.5,52.9 77.875,52.9 78.7,53.725 78.7,55.9 78.054,56.546 78.054,56.555 77.9,56.709 77.9,57.186 Q1.3
  Top Layer w0.508: D5.2 20.049,61.4 19.9,61.251 19.9,52.6 21.3,51.2 v1(25.8,51.2) ; K1.7 24.559,42 24.8,41.759 v1(24.8,40.1)
  Bottom Layer w0.508: v1(24.8,40.1) 25.728,40.1 26.026,40.398 26.026,50.787 25.8,51.013 v1(25.8,51.2)
NetD6_2: D6.2 K1.12 Q1.6 | length 68.4
  Top Layer w0.254: K1.12 45.6,54.7 46.8,55.9 46.8,59.8 48.1,61.1 70.2,61.1 72.3,63.2 73.6,63.2 74.3,62.5 74.3,60.451 74.7,60.051 76.351,60.051 76.5,59.902 Q1.6@76.5,59.451
  Top Layer w0.508: D6.2 21.425,55.175 21.9,54.7 K1.12
NetD7_2: D7.2 K2.7 Q2.6 | length 52.9
  Top Layer w0.254: D7.2 48.125,26.025 50.85,28.75 82.25,28.75 82.5,28.5 82.5,25.9 82.8,25.6 83.136,25.264 Q2.6@84.925,25.264
  Top Layer w0.508: K2.7 39.3,26.398 39.598,26.1 D7.2@44.854,26.1
NetD8_2: D8.2 K2.12 Q2.3 | length 73
  Top Layer w0.254: D8.2@42.675,25 D8.2 78.95,25.025 79.7,24.275 79.7,20.1 80.3,19.5 86.4,19.5 86.9,20 86.9,22.875 86.639,23.136 Q2.3@86.225,23.136
  Top Layer w0.508: K2.12 26.6,25.7 27.3,25 D8.2@42.675,25
NetN3_7: N3.7 R4.1 | length 21
  Top Layer w0.305: R4.1@48.953,40.575 N3.7
NetN3_9: N3.9 R9.2 R10.2 | length 6.5
  Top Layer w0.254: R10.2 R9.2 73.45,39.75 73.625,39.925 N3.9 ; R10.2@73.65,35.7 R10.2@73.65,36
NetN3_11: N3.11 N4.6 R11.2 | length 52
  Top Layer w0.254: N3.11 78.475,41.225 R11.2 114.75,41.25 114.8,41.2 116.1,42.5 116.1,49 115.048,50.052 N4.6
NetN3_14: N3.14 N4.28 | length 73.2
  Top Layer w0.254: N3.14 73.775,43.175 72.6,42 72.6,33.75 72.75,33.6 128.322,33.6 N4.28
NetN4_1: N4.1 R12.2 U3.15 | length 53.2
  Top Layer w0.305: U3.15 65.725,74.65 66.15,75.075 R12.2@66.45,75.075 ; R12.2 66.675,75.2 84.2,75.2 96.648,62.752 N4.1
NetN4_2: N4.2 P9.1 | length 44.3
  Bottom Layer w0.508: N4.2 118.112,60.212 138.1,80.2 P9.1
NetN4_3: N4.3 R13.2 U3.13 | length 54.3
  Top Layer w0.254: U3.13 68.925,73.35 R13.2 80.225,73.375 95.928,57.672 N4.3
NetN4_4: N4.4 U3.10 | length 54.5
  Top Layer w0.254: U3.10 64.1,71.375 67.889,71.375 70.632,68.632 72.132,68.632 79.568,68.632 93.068,55.132 N4.4
NetN4_9: N4.9 R44.2 | length 48.3
  Top Layer w0.508: R44.2 v2(91.6,21.3)
  Bottom Layer w0.508: v2(91.6,21.3) 108.2,21.3 116.4,29.5 116.4,41.4 115.368,42.432 N4.9
NetN4_10: N4.10 R43.1 | length 38.8
  Top Layer w0.508: R43.1 v2(91.581,27)
  Bottom Layer w0.508: v2(91.581,27) 111.1,27 114.3,30.2 114.3,38.8 113.232,39.868 N4.10
NetN4_11: N4.11 R35.2 | length 42.1
  Top Layer w0.508: R35.2 v2(82,61.6)
  Bottom Layer w0.508: v2(82,61.6) 84.2,61.6 108.451,37.349 N4.11
NetN4_12: N4.12 R33.2 | length 40.5
  Top Layer w0.508: R33.2 v2(82,55.3)
  Bottom Layer w0.508: v2(82,55.3) 85.9,55.3 106.412,34.788 N4.12
NetN4_13: N4.13 U1.3 U2.3 | length 133.9
  Top Layer w0.254: U2.3 28.174,13.774 27.5,13.1 27.5,6.7 29.3,4.9 55.2,4.9 ; U1.3 56.4,13.1 55.2,11.9 55.2,4.9 ; N4.13 111.698,32.1 100.4,32.1 99.5,31.2 99.5,6 98.4,4.9 55.2,4.9
NetN4_17: N4.17 R16.1 | length 6.9
  Top Layer w0.305: R16.1@138.872,57.622 R16.1
  Top Layer w0.508: N4.17 132.218,57.7 R16.1
NetN4_20: N4.20 U10.3 | length 111.1
  Top Layer w0.254: U10.3 56.4,89 59.6,85.8 113.5,85.8 128.6,70.7 128.6,50.6 129.148,50.052 N4.20
NetN4_21: N4.21 P10.1 P11.1 | length 12.4
  Top Layer w0.508: N4.21@132.241,47.461 P11.1 ; P11.1@141.262,47.346 P11.1 ; P10.1 P11.1
  Bottom Layer w0.508: N4.21 N4.21@132.241,47.461
NetN4_23: N4.23 U12.5 | length 45.8
  Top Layer w0.254: v1(143.1,6.8) 143.105,6.795 144.741,6.795 145.039,7.092 U12.5
  Bottom Layer w0.508: N4.23 135.602,42.408 135.9,42.11 135.9,17.3 141.807,11.393 141.807,8.083 v1@143.09,6.8
NetN4_25: N4.25 R17.1 | length 11.2
  Top Layer w0.508: N4.25 136.072,37.328 138.35,35.05 R17.1
NetN4_26: N4.26 R18.1 | length 11.8
  Top Layer w0.508: N4.26 135.888,34.812 136.9,33.8 136.9,28.698 137.198,28.4 R18.1
NetN4_27: N4.27 R10.1 | length 58.7
  Top Layer w0.254: v1(79.1,34.6) 81,34.6 82.4,36 128.462,36 N4.27
  Top Layer w0.508: R10.1 77.7,36 v1(79.1,34.6)
NetP2_1: P2.1 U7.1 U7.4 | length 19.1
  Top Layer w0.508: P2.1 24.5,86 25,85.5 25,83.852 ; U7.1 24.702,84.15 25,83.852 ; U7.4 25.298,82.25 25,82.548 25,83.852
NetP3_1: P3.1 U8.1 U8.4 | length 26
  Top Layer w0.508: P3.1 17.5,66 18,66.5 18,71.202 18.298,71.5 27.202,71.5 27.5,71.202 27.5,69.902 ; U8.1 27.202,70.2 27.5,69.902 ; U8.4 28.2,68.3 27.5,69 27.5,69.902
NetP10_2: P10.2 R39.2 U9.2 | length 6.2
  Top Layer w0.508: P10.2 143.977,44.401 R39.2 144.277,42.311 144.573,42.015 144.573,41.715 145.397,40.891 U9.2
NetP11_2: P11.2 R47.2 U16.2 | length 6.8
  Top Layer w0.508: P11.2@143.967,47.511 R47.2@146.577,47.511 ; R47.2 148.32,47.484 U16.2
NetQ1_2: Q1.2 R33.1 R36.1 | length 3.4
  Top Layer w0.305: R36.1@75.775,55.3 R33.1 ; R33.1@77.2,55.35 Q1.2
NetQ1_5: Q1.5 R35.1 R38.1 | length 3.7
  Top Layer w0.305: Q1.5 R35.1@77.2,61.55
  Top Layer w0.508: R38.1 R35.1
NetQ2_2: Q2.2 R44.1 R45.1 | length 3.6
  Top Layer w0.254: R45.1 R44.1@85.55,21.3 ; R44.1@85.55,21.35 R44.1@85.6,21.3
  Top Layer w0.305: R44.1@85.575,21.325 Q2.2@85.575,23.136
NetQ2_5: Q2.5 R43.2 R46.1 | length 3.4
  Top Layer w0.305: R46.1 R43.2 85.575,26.975 Q2.5@85.575,25.264
NetR6_1: R6.1 U1.5 | length 4.6
  Top Layer w0.254: U1.5 58.649,12.1 58.5,11.951 58.5,9.9 58.7,9.7 R6.1
NetR7_1: R7.1 U2.6 | length 2.9
  Top Layer w0.305: U2.6 31.082,11.824 31.019,11.761 31.019,10.812 31.198,10.634 31.552,10.634 31.95,10.236 R7.1
NetR14_1: R14.1 U3.9 | length 2.4
  Top Layer w0.305: U3.9 65.975,70.75 R14.1
NetR15_1: R15.1 U3.16 | length 1.3
  Top Layer w0.305: U3.16 64.127,75.3 64.15,75.323 R15.1
NetR19_1: R19.1 U3.3 | length 24.8
  Top Layer w0.305: R19.1 45.6,77.1 52.9,77.1 56,74 U3.3
NetR19_2: R19.2 R34.1 | length 7.9
  Top Layer w0.508: R34.1 26.55,77.75 27.2,77.1 R19.2
NetR20_1: R20.1 U3.7 | length 24.6
  Top Layer w0.305: R20.1 43.5,62.5 52.4,71.4 U3.7
NetR20_2: R20.2 R37.1 | length 9
  Top Layer w0.508: R37.1 28.974,62.926 29.4,62.5 R20.2
NetR41_1: R41.1 U10.5 | length 4.6
  Top Layer w0.254: U10.5 50.101,90 50.249,90.149 50.249,92.051 50.101,92.2 R41.1@48.999,92.2
pos_out: C4.2 C5.2 C6.2 C37.2 C38.2 C39.2 C40.2 C46.1 C48.2 N1.4 U1.9 U1.10 U7.2 U8.2 U15.2 | length 39
  Top Layer w0.254: U1.9 65.95,13.6 C48.2@66.4,14.05 ; U1.10 C48.2@66.4,14.1 ; C48.2@66.4,14.2 C48.2@66.65,14.2
  Top Layer w0.508: v1(17.4,84.348) 17.402,84.35 C39.2 C40.2 21.7,83.498 21.998,83.2 U7.2 ; v1(19.924,70.398) 19.926,70.4 C38.2 C37.2 24.124,69.548 24.421,69.25 U8.2 ; C4.2@36.71,33.74 N1.4 39.26,36.09 C46.1@39.35,36 ; C4.2 36.75,31.998 37.048,31.7 v1(40.5,31.7) ; U15.2 48.553,45.3 C5.2 48.622,45.269 50.472,45.269 v1(50.503,45.3) ; C6.2 v1(66.8,16) 66.8,14.35 C48.2@66.65,14.2
  other v3: 71,18
REFCAP: C10.2 N3.6 | length 2
  Top Layer w0.305: C10.2@68,41.15 68.075,41.225 N3.6
REFIO: C11.2 C12.2 N3.4 N3.15 | length 10.7
  Top Layer w0.305: N3.4 71.925,42.525 73.225,43.825 N3.15 77.9,43.825 80.075,43.825 C12.2@80.1,43.85
SPI1_MISO: N3.13 N4.8 U3.8 | length 89.7
  Top Layer w0.254: U3.8 60.101,70.75 60.25,70.601 60.25,65.325 60.75,64.825 80.775,64.825 92.64,52.96 92.64,44.972 ; N3.13 75.872,42.576 77.076,42.576 77.5,43 81.728,43 83.7,44.972 92.64,44.972 ; N4.8 92.64,44.972
SPI1_MOSI: N3.10 N4.22 U3.14 | length 142.9
  Top Layer w0.254: U3.14 67.525,74 68.025,74.5 82.1,74.5 95,61.6 124.5,61.6 125.5,60.6 125.5,45.121 ; N3.10 76.825,40.575 77.2,40.2 79.8,40.2 81.3,38.7 117.3,38.7 123.572,44.972 N4.22 N4.22@131.962,45.2
SPI1_SCK: N3.12 N4.7 U3.12 | length 102.3
  Top Layer w0.254: U3.12 66.475,72.7 66.675,72.5 78.4,72.5 v2(94.6,56.3) ; N3.12 77.366,41.875 77.991,42.5 83,42.5 84.2,43.7 113.2,43.7 113.9,44.4 113.9,47.1 113.488,47.512 N4.7
  Bottom Layer w0.254: v2(94.6,56.3) 103.388,47.512 N4.7
TIA_out: K1.9 N1.6 R3.2 | length 19.2
  Top Layer w0.762: K1.9 26.454,47.08 26.9,46.634 26.9,42.246 27.346,41.8 33.7,41.8 34.17,42.27 N1.6 34.17,46.28 R3.2
pads on no net: K1.3 K1.4 K1.5 K2.3 K2.4 K2.5 K2.8 N1.1 N1.5 N1.8 N4.5 N4.14 N4.15 N4.16 N4.19 N4.24 U1.4 U2.4 U2.7 U3.2 U3.6 U10.4 U12.3 U12.7 U16.3

## Polygon pours and split planes (outlines as drawn)
GND on Top inner "NONET_L-01_P-001" (solid, pour order 0): 0,100 160,100 160,0 0,0
pos_out on Bottom inner "POS_OUT_L03_P002" (solid, pour order 2): 49,17 49,0 77,0 77,22 73,26 64,26 54,26 52,28 52,47 51,48 51,61 49,63 43,63 41,65 41,82 40,83 35,83 33.996,81.996 26.004,81.996 21,87 16,87 15,86 15,78 16,77 35,77 37,75 37,70 36,69 29,69 26,72 19,72 17,70 17,52 19,50 38,50 41,47 41,36 39,34 37,34 36,33 36,30 34,28 24,28 22,26 22,17 23,17
DVDD on Bottom inner "DVDD_L03_P007" (solid, pour order 7): 73,26 73,51 72,52 65,52 64,53 64,100 160,100 160,0 77,0 77,22
AVDD on Bottom inner "AVDD_L03_P004" (solid, pour order 4): 52,28 54,26 73,26 73,51 72,52 65,52 64,53 64,100 35,100 35,83 40,83 41,82 41,65 43,63 49,63 51,61 51,48 52,47
neg_out on Bottom inner "NEG_OUT_L03_P001" (solid, pour order 1): 22,17 49,17 49,0 0,0 0,16 0,100 35,100 35,83 33.996,81.996 26.004,81.996 21,87 16,87 15,86 15,78 16,77 35,77 37,75 37,70 36,69 29,69 26,72 19,72 17,70 17,52 19,50 38,50 41,47 41,36 39,34 37,34 36,33 36,30 34,28 24,28 22,26
no net on Top Solder (solid): 160,100 0,100 0,97 160,97
GND on Top Layer "GND_L01_P012" (solid, pour order 12): 0,100 0,97 160,97 160,100
GND on Top Layer "GND_L01_P011" (solid, pour order 11): 0,3 0,0 160,0 160,3
GND on Bottom Layer "GND_L04_P014" (solid, pour order 14): 160,3 160,0 0,0 0,3
GND on Bottom Layer "GND_L04_P013" (solid, pour order 13): 0,100 0,97 160,97 160,100

## Silkscreen, mask and mechanical layers (free items; w line width, h text height)
Top Overlay:
  drawing of 9 lines, arcs and shapes, not listed
  text "Drain" at 1.3,94.3 h1.52
  text "Sponsert by:" at 71.3,93.808 h1.52
  text "AVDD" at 44.973,78.073 h1.52 r270
  text "gnd" at 49.458,78.046 h1.52 r270
  text "Gate" at 1.3,74.3 h1.52
  text "Source" at 1.3,41.3 h1.52
  text "gnd" at 72.827,21.585 h1.52
  text "gnd" at 143.827,21.585 h1.52
  text "gnd" at 16.954,18.458 h1.52
  text "pos" at 72.8,17.608 h1.52
  text "pos" at 143.8,17.608 h1.52
  text "neg" at 16.927,14.481 h1.52
Top Solder:
  rectangle: 0,0 160,3
Bottom Solder:
  rectangle: -0.254,97 159.746,100
  rectangle: 0,0 160,3
Mechanical 1:
  lines w0.254: 160,0 160,100 0,100 0,0 160,0 ; 160,0 160,0
Drill Drawing:
  circle w0.203: c2.476,123.547 r0.847
  lines w0.203: 1.63,115.08 2.476,115.503 3.323,115.08 2.9,115.927 3.323,116.773 2.476,116.35 1.63,116.773 2.053,115.927 1.63,115.08 ; 1.63,118.89 3.323,118.89 3.323,120.583 1.63,120.583 1.63,118.89 ; 1.63,126.933 2.053,126.933 2.476,126.51 2.9,126.933 3.323,126.933 2.9,127.357 3.323,127.78 2.9,127.78 2.476,128.203 2.053,127.78 1.63,127.78 2.053,127.357 1.63,126.933 ; 1.63,130.32 1.63,130.743 2.053,131.167 1.63,131.59 1.63,132.013 2.053,132.013 2.476,131.59 2.9,132.013 3.323,132.013 3.323,131.59 2.9,131.167 3.323,130.743 3.323,130.32 2.9,130.32 2.476,130.743 2.053,130.32 1.63,130.32 ; 1.63,134.553 2.053,134.553 2.053,134.13 2.9,134.13 2.9,134.553 3.323,134.553 3.323,135.4 2.9,135.4 2.9,135.823 2.053,135.823 2.053,135.4 1.63,135.4 1.63,134.553 ; 1.63,138.787 2.476,137.94 3.323,138.787 2.476,139.633 1.63,138.787 ; 1.63,143.443 3.323,143.443 2.476,141.75 1.63,143.443
  lines w0.254: 0.127,113.937 142.288,113.937 ; 0.127,144.417 142.288,144.417 ; 13.957,110.127 13.957,148.227 ; 28.837,110.127 28.837,148.227 ; 57.175,110.127 57.175,148.227 ; 69.862,110.127 69.862,148.227 ; 88.338,110.127 88.338,148.227 ; 126.325,110.127 126.325,148.227 ; 0.127,110.127 142.288,110.127 142.288,148.227 0.127,148.227 0.127,110.127
  text "Symbol" at 2.413,145.56 h1.83
  text "Count" at 15.1,145.56 h1.83
  text "Hole Size" at 29.98,145.56 h1.83
  text "Plated" at 58.318,145.56 h1.83
  text "Hole Type" at 71.005,145.56 h1.83
  text "Drill Layer Pair" at 89.481,145.56 h1.83
  text "Via/Pad" at 127.468,145.56 h1.83
  text "69" at 15.1,141.75 h1.52
  text "27,56mil (0,700mm)" at 29.98,141.75 h1.52
  text "PTH" at 58.318,141.75 h1.52
  text "Round" at 71.005,141.75 h1.52
  text "Top Layer - Bottom Layer" at 89.481,141.75 h1.52
  text "Via" at 127.468,141.75 h1.52
  text "9" at 15.1,137.94 h1.52
  text "28,00mil (0,711mm)" at 29.98,137.94 h1.52
  text "PTH" at 58.318,137.94 h1.52
  text "Round" at 71.005,137.94 h1.52
  text "Top Layer - Bottom Layer" at 89.481,137.94 h1.52
  text "Via" at 127.468,137.94 h1.52
  text "7" at 15.1,134.13 h1.52
  text "31,50mil (0,800mm)" at 29.98,134.13 h1.52
  text "PTH" at 58.318,134.13 h1.52
  text "Round" at 71.005,134.13 h1.52
  text "Top Layer - Bottom Layer" at 89.481,134.13 h1.52
  text "Pad" at 127.468,134.13 h1.52
  text "6" at 15.1,130.32 h1.52
  text "31,50mil (0,800mm)" at 29.98,130.32 h1.52
  text "PTH" at 58.318,130.32 h1.52
  text "Round" at 71.005,130.32 h1.52
  text "Top Layer - Bottom Layer" at 89.481,130.32 h1.52
  text "Via" at 127.468,130.32 h1.52
  text "3" at 15.1,126.51 h1.52
  text "35,00mil (0,889mm)" at 29.98,126.51 h1.52
  text "PTH" at 58.318,126.51 h1.52
  text "Round" at 71.005,126.51 h1.52
  text "Top Layer - Bottom Layer" at 89.481,126.51 h1.52
  text "Pad" at 127.468,126.51 h1.52
  text "28" at 15.1,122.7 h1.52
  text "35,43mil (0,900mm)" at 29.98,122.7 h1.52
  text "PTH" at 58.318,122.7 h1.52
  text "Round" at 71.005,122.7 h1.52
  text "Top Layer - Bottom Layer" at 89.481,122.7 h1.52
  text "Pad" at 127.468,122.7 h1.52
  text "28" at 15.1,118.89 h1.52
  text "39,37mil (1,000mm)" at 29.98,118.89 h1.52
  text "PTH" at 58.318,118.89 h1.52
  text "Round" at 71.005,118.89 h1.52
  text "Top Layer - Bottom Layer" at 89.481,118.89 h1.52
  text "Pad" at 127.468,118.89 h1.52
  text "8" at 15.1,115.08 h1.52
  text "78,74mil (2,000mm)" at 29.98,115.08 h1.52
  text "PTH" at 58.318,115.08 h1.52
  text "Round" at 71.005,115.08 h1.52
  text "Top Layer - Bottom Layer" at 89.481,115.08 h1.52
  text "Pad" at 127.468,115.08 h1.52
  text "158 Total" at 15.1,111.27 h1.52

## Dimensions
160,0 to 160,81 on Mechanical 1
0,100 to 0,97 on Mechanical 1
0,0 to 0,3 on Mechanical 1
0,0 to 160,0 on Mechanical 1
0,0 to 0,100 on Mechanical 1

## Text inside footprints (layer, text, board x,y; h text height)
D5: Top Overlay "*" at 17.2,62.5 h1.27; Mechanical 13 "*" at 18.212,60.765 h1.27
D6: Top Overlay "*" at 17.2,57.1 h1.27; Mechanical 13 "*" at 18.212,58.865 h1.27
D7: Top Overlay "*" at 47.4,21.9 h1.27 r90; Mechanical 13 "*" at 45.535,22.812 h1.27 r90
D8: Top Overlay "*" at 42,20.4 h1.27 r90; Mechanical 13 "*" at 43.335,21.812 h1.27 r90
K1: Top Overlay "*" at 15,56.3 h1.27; Mechanical 13 "*" at 15.683,55.123 h1.27
K2: Top Overlay "*" at 25,20.7 h1.27 r90; Mechanical 13 "*" at 26.177,21.183 h1.27 r90
N3: Top Overlay "*" at 69.3,44.9 h1.27; Mechanical 13 "*" at 70.716,43.407 h1.27
Q1: Top Overlay "*" at 75.2,56.9 h1.27 r90
Q2: Top Overlay "*" at 83.875,22.725 h1.27 r90
U1: Top Overlay "*" at 58.7,14.5 h1.27; Mechanical 13 "*" at 60.414,13.303 h1.27
U2: Top Overlay "*" at 30.5,15.549 h1.27; Mechanical 13 "*" at 32.214,14.173 h1.27
U3: Top Overlay "*" at 56.4,79.6 h1.27; Mechanical 13 "*" at 59.063,74.179 h1.27
U7: Top Overlay "*" at 22.65,85 h1.27; Mechanical 13 "*" at 24.26,83.566 h1.27
U8: Top Overlay "*" at 24.9,71.7 h1.27; Mechanical 13 "*" at 26.684,69.616 h1.27
U10: Top Overlay "*" at 50,86.6 h1.27 r180; Mechanical 13 "*" at 48.235,88.797 h1.27 r180
U12: Top Overlay "*" at 139.4,11.7 h1.27
U15: Top Overlay "*" at 46.703,43.2 h1.27 r180; Mechanical 13 "*" at 45.843,44.934 h1.27 r180